# Altium PCB Test.PcbDoc (part 2 of 2)
Units mil, origin at the board's own origin, x right, y up, seen from the top; angles counter-clockwise.
Board outline 6000 x 4000 mil, 2 copper layers (Top Layer, Bottom Layer); 258 components, 193 nets, 731 pads, 0 vias.
Unrouted connection lines stored in the file: 545.
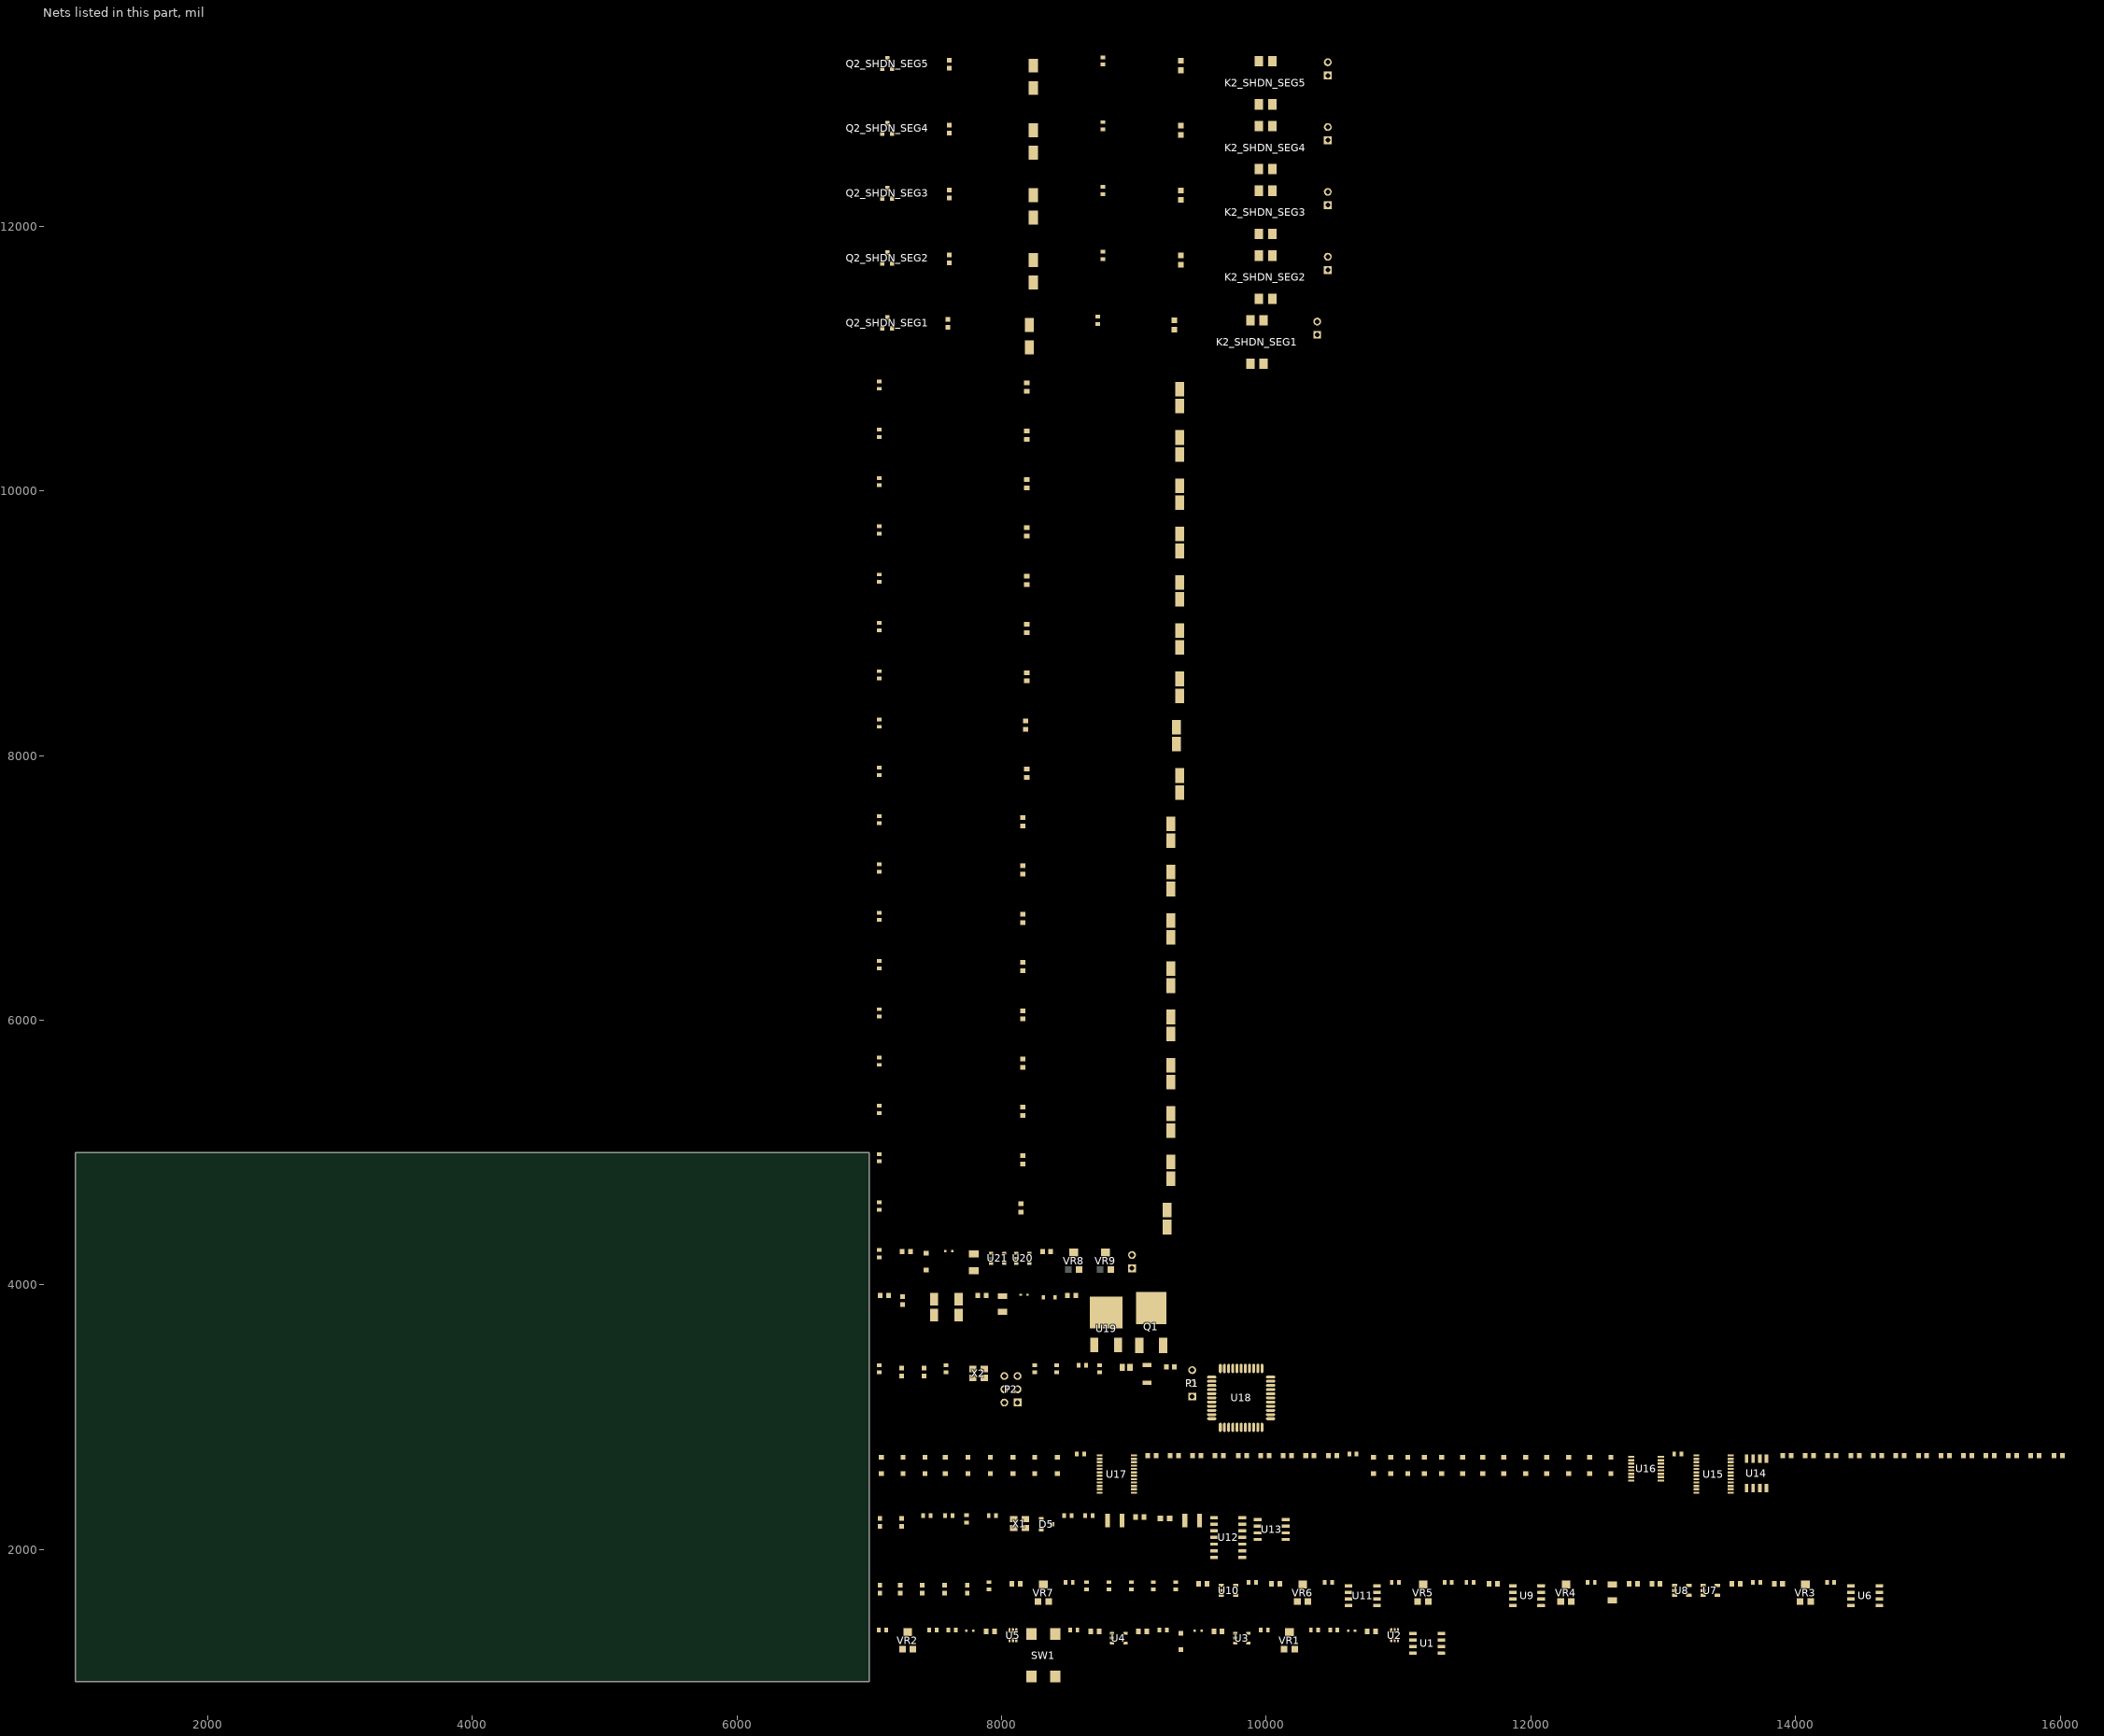
[diagram p2: the nets of this part, all layers, seen from the top]

## Part data
C1 C2 C3 C4 C5 C6 C8 C9 C10 C11 C13 C14 C17 C18 C19 C20 C21 C24 C27 C28_SHDN_INPUT_PROTECTION1 C28_SHDN_INPUT_PROTECTION2 C28_SHDN_INPUT_PROTECTION3 C28_SHDN_INPUT_PROTECTION4 C28_SHDN_INPUT_PROTECTION5 C28_SHDN_INPUT_PROTECTION6 C28_SHDN_INPUT_PROTECTION7 C28_SHDN_INPUT_PROTECTION8 C28_SHDN_INPUT_PROTECTION9 C28_SHDN_INPUT_PROTECTION10 C28_SHDN_INPUT_PROTECTION11 C28_SHDN_INPUT_PROTECTION12 C28_SHDN_INPUT_PROTECTION13 C28_SHDN_INPUT_PROTECTION14 C28_SHDN_INPUT_PROTECTION15 C28_SHDN_INPUT_PROTECTION16 C28_SHDN_INPUT_PROTECTION17 C28_SHDN_INPUT_PROTECTION18: library part CMP-1035-02591-1, "CAP 100nF 50V ±5% 0603 (1608 Metric) Thickness 1mm SMD", Case-EIA=0603, Case-Metric=1608, Rated Voltage="50 V", Tolerance=±5%, Max Thickness="1 mm", Technology=SMT
C7 C25 C26: library part CMP-1037-04982-1, "CAP 10uF 50V ±10% 1206 (3216 Metric) Thickness 1.9mm SMD", Case-EIA=1206, Case-Metric=3216, Rated Voltage="50 V", Tolerance=±10%, Max Thickness="1.9 mm", Technology=SMT
C12: library part CMP-1035-02202-1, "CAP 4.7nF 50V ±5% 0603 (1608 Metric) Thickness 1mm SMD", Case-EIA=0603, Case-Metric=1608, Rated Voltage="50 V", Tolerance=±5%, Max Thickness="1 mm", Technology=SMT
C15 C16 C22 C23: library part CMP-1035-00748-1, "CAP 18pF 50V ±1% 0603 (1608 Metric) Thickness 1mm SMD", Case-EIA=0603, Case-Metric=1608, Rated Voltage="50 V", Tolerance=±1%, Max Thickness="1 mm", Technology=SMT
D1 D3 D4 D33 D37: library part CMP-1063-00102-1, "Transient Voltage Suppressor, Micro-Packaged Diode for ESD Protection, 2-Pin SOD-523, Pb-Free, Tape and Reel", Manufacturer="On Semiconductor", ComponentLink1Description="Manufacturer URL", ComponentLink1URL=http://www.onsemi.com/, ComponentLink2Description=Datasheet, ComponentLink2URL=http://www.onsemi.cn/pub_link/Collateral/ESD5Z2.5T1-D.PDF, ComponentLink3Description="Package Specification", ComponentLink3URL=http://www.onsemi.com/pub_link/Collateral/502-01.PDF, DatasheetVersion="Rev. 10", Direction=Unidirectional, IR Max (uA)=0.05, Mounting Technology="Surface Mount", Number of Lines=1, PackageDescription="2-Pin SOD, Body 1.2 x 0.8 mm", PackageReference=SOD-523-2-502-01, PackageVersion="Rev. E, 09/2010", Packing="Tape and Reel", PartNumber=ESD5Z5.0T1G, PPK Max (W)=174, RoHS=Pb-Free, V(BR) Min (V)=6.2, VRWM Max (V)=5
D2 D6 D7 D8 D9 D10 D11 D12 D13 D14 D15 D16 D17 D18 D19 D20 D21 D22 D23 D24 D25 D26 D27 D36: library part CMP-2000-05976-1, "Surface Mount Zener Diode, 5.1 V, -65 to 150 degC, 2-Pin SMD (SOD-123), RoHS, Tape and Reel", Ir - Reverse Current=2uA, Manufacturer=DiodesIncorporated, Maximum Operating Temperature=+150C, Minimum Operating Temperature=-65C, Package / Case=SOD-123, Package Description="2-Pin Surface Mount Device, Body 2.7 x 1.55 mm", Package Reference=SOD123, Pd - Power Dissipation=500mW, Voltage Temperature Coefficient=-0.75mV/C, Voltage Tolerance=6%, Vz - Zener Voltage=5.1V, Zener Current=5mA, Brand=DiodesIncorporated, Configuration=Single, Datasheet URL=http://www.diodes.com/_files/datasheets/ds18004.pdf, Datasheet Version="Rev. 37-2, 09/2012", Factory Pack Quantity=3000, Height=1.35mm, Length=2.85mm, Manufacturer URL=http://www.diodes.com/, Mounting Style=SMD/SMT, Mounting Technology=SurfaceMount, Packaging=Reel, Product Category=ZenerDiodes, RoHS=True, Series=BZT52C5, Termination Style=SMD/SMT, Unit Weight=0.000353oz, Width=1.7mm, Zz - Zener Impedance=60Ohms
D5: library part CMP-1063-00164-1, "Dual Line CAN Bus Protector, 3-Pin SOT-23, Pb-Free, Tape and Reel", Manufacturer="On Semiconductor", C Max (pF)=30, ComponentLink1Description="Manufacturer URL", ComponentLink1URL=http://www.onsemi.com/, ComponentLink2Description=Datasheet, ComponentLink2URL=http://www.onsemi.cn/pub_link/Collateral/NUP2105L-D.PDF, ComponentLink3Description="Package Specification", ComponentLink3URL=http://www.onsemi.cn/pub_link/Collateral/318-08.PDF, DatasheetVersion="Rev. 5", Direction=Bidirectional, IR Max (uA)=0.1, Mounting Technology="Surface Mount", Number of Lines=2, PackageDescription="3-Pin Small Outline Transistor, Body 2.92 x 1.3 mm, Pitch 0.95 mm", PackageReference=SOT-23-3-318-08, PackageVersion="Rev. AP, 11/2009", Packing="Tape and Reel", PartNumber=NUP2105LT1G, PPK Max (W)=350, RoHS=Pb-Free, V(BR) Min (V)=26.2
D32: library part CMP-1060-00715-1, "Zener Voltage Regulator, 300 mW, 2-Pin SOD-323, Pb-Free, Tape and Reel", Manufacturer="On Semiconductor", ComponentLink1Description="Manufacturer URL", ComponentLink1URL=http://www.onsemi.com/, ComponentLink2Description=Datasheet, ComponentLink2URL=http://www.onsemi.cn/pub_link/Collateral/MM3Z2V4T1-D.PDF, ComponentLink3Description="Package Specification", ComponentLink3URL=http://www.onsemi.com/pub_link/Collateral/477-02.PDF.1, DatasheetVersion="Rev. 9", Mounting Technology="Surface Mount", PackageDescription="2-Pin SOD, Body 1.7 x 1.25 mm", PackageReference=SOD-323-2-477-02, PackageVersion="Rev. H, 03/2007", Packing="Tape and Reel", PartNumber=MM3Z10VT1G, P Max (W)=0.3, RoHS=Pb-Free, VZ Typ (V)=10
D34 D35 D39_SHDN_INPUT_PROTECTION1 D39_SHDN_INPUT_PROTECTION2 D39_SHDN_INPUT_PROTECTION3 D39_SHDN_INPUT_PROTECTION4 D39_SHDN_INPUT_PROTECTION5 D39_SHDN_INPUT_PROTECTION6 D39_SHDN_INPUT_PROTECTION7 D39_SHDN_INPUT_PROTECTION8 D39_SHDN_INPUT_PROTECTION9 D39_SHDN_INPUT_PROTECTION10 D39_SHDN_INPUT_PROTECTION11 D39_SHDN_INPUT_PROTECTION12 D39_SHDN_INPUT_PROTECTION13 D39_SHDN_INPUT_PROTECTION14 D39_SHDN_INPUT_PROTECTION15 D39_SHDN_INPUT_PROTECTION16 D39_SHDN_INPUT_PROTECTION17 D39_SHDN_INPUT_PROTECTION18: library part CMP-0548-00180-2, "Transient Voltage Suppressor, 6.40 to 231 V, 18 V Stand-off Voltage, Bi-Directional, -55 to 155 degC, 2-pin DO-214AC, Pb-Free, Tape and Reel", Manufacturer="Vishay Semiconductor", Operating Junction and Storage Temperature Range="-55 to 150 degC", ComponentLink1Description="Manufacturer URL", ComponentLink1URL=http://www.vishay.com/, ComponentLink2Description=Datasheet, ComponentLink2URL=http://www.vishay.com/docs/88390/smaj50a.pdf, ComponentLink3Description="Package Specification", ComponentLink3URL=http://www.vishay.com/docs/88390/smaj50a.pdf, DatasheetVersion=12/8/2013, ID (uA)=2, IFSM="40 A", Mounting Technology="Surface Mount", PackageDescription="2-Pin DO-214AC (SMA), Body 4.245 x 2.665 mm", PackageReference=DO-214AC-2, Packing="Tape and Reel", PartNumber=SMAJ18CA-E3/61, PPPM (W)="400, 300", RoHS=TRUE, VBR Bi-Directional (V)="6.4 to 231", VWM (V)=18
D38_SHDN_SEG1 D38_SHDN_SEG2 D38_SHDN_SEG3 D38_SHDN_SEG4 D38_SHDN_SEG5: library part CMP-2000-04942-2, "General Purpose Rectifier, 1 A, 1000 V, -55 to 150 degC, 2-Pin DO-214AC, RoHS, Tape and Reel", Alternate Case Style=DO-214AC, Current If @ Vf=1A, Current Ifsm=30A, Forward Voltage=1V, Junction Temperature Tj Max=150degC, Manufacturer=Fairchild, Operating Temperature Min=-55degC, Operating Temperature Range=-55degCto+150degC, Package / Case=SMA, Package Description="2-Pin Surface Mount Device, Body 4.375 x 2.725 mm", Package Reference=DO-214AC-2, Repetitive Reverse Voltage Vrrm Max=1kV, Datasheet URL=https://datasheet.ciiva.com/4452/s1m-191340-4452980.pdf, Datasheet Version="Rev. 1.1.2, 10/2013", Diode Case Style=DO-214AC, Diode Configuration=Single, Diode Polarity=Cathode, Diode Type=StandardRecovery, External Depth=2.79mm, External Length / Height=2.44mm, External Width=5.28mm, Forward Current If(AV)=1A, Forward Surge Current Ifsm Max=30A, Forward Voltage VF Max=1V, Manufacturer URL=https://www.fairchildsemi.com/, No. of Pins=2, Operating Temperature Max=150degC, Package URL=https://www.fairchildsemi.com/package-drawings/DO/DO214AC.pdf, Reel Quantity=7500, Reverse Recovery Time trr Max=1.8µs, Reverse Recovery Time trr Typ=1.8µs, SMD Marking=1M, SVHC=NoSVHC(19-Dec-2012), Tape Width=12mm, Termination Type=SMD
DS1 DS2 DS3 DS4 DS5: library part "LED RED 0603"
DS6 DS7: library part "LED BLUE 0603"
DS8 DS9 DS11_SHDN_SEG1 DS11_SHDN_SEG2 DS11_SHDN_SEG3 DS11_SHDN_SEG4 DS11_SHDN_SEG5: library part "LED ORANGE 0603"
DS10: library part "LED GREEN 0603"
K2_SHDN_SEG1 K2_SHDN_SEG2 K2_SHDN_SEG3 K2_SHDN_SEG4 K2_SHDN_SEG5: library part CMP-1346-00006-1, "PhotoMOS GE 1 Form A, 60 V Load Voltage, 0.55 A Continuous Load Current, -40 to 85 degC, 4-Pin DIP(SMT), Tube, RoHS", Continuous Load Current="0.55 A", Load Voltage="60 V", Manufacturer=Panasonic, On Resistance (Typ)="0.85 Ohm", ComponentLink1Description="Manufacturer URL", ComponentLink1URL=http://www3.panasonic.biz/ac/ae/index.jsp, ComponentLink2Description=Datasheet, ComponentLink2URL=http://www3.panasonic.biz/ac/e_download/control/relay/photomos/catalog/semi_eng_ge1a_aqy21_e.pdf, ComponentLink3Description="Package Specification", ComponentLink3URL=http://www3.panasonic.biz/ac/e_download/control/relay/photomos/catalog/semi_eng_dimensions.pdf?f_cd=401560, DatasheetVersion=201404-T, Mounting Technology="Surface Mount", PackageDescription="4-Pin Surface Mount Terminal Package, Body 4.78 x 6.4 mm, Pitch 2.54mm", PackageReference=DIP4(SMT), PackageVersion="ASCTB67E, 04/2014", Packing=Tube, PartNumber=AQY212EHA, Pb-Free=True, RoHS=True, Series="PhotoMOS GE 1 Form A"
L1: library part CMP-2000-06587-1, "Fixed Inductor, 10 uH, +/-20%, -55 to 125 degC, 2-Pin SMD (0805), RoHS, Tape and Reel", Case Size/Dimension=0805, DC Resistance=0.6, Inductance-Nom=10H, Manufacturer=Murata, Package Description="2-Pin Surface Mount Device, Body 2 x 1.25 mm", Package Reference=IND0805, Rated Current-Max=100mA, Tolerance (%)=20%, Datasheet URL=http://psearch.en.murata.com/inductor/product/LQM21FN100M70%23.pdf, Datasheet Version=05/2016, Manufacturer URL=http://www.murata.com/, Mounting Technology=SurfaceMount
P1: "Header, 3-Pin", LatestRevisionDate=17-Jul-2002, LatestRevisionNote="Re-released for DXP Platform.", Publisher="Altium Limited"
P2: "Header, 3-Pin, Dual row", LatestRevisionDate=17-Jul-2002, LatestRevisionNote="Re-released for DXP Platform.", Publisher="Altium Limited"
P3 P4_SHDN_SEG1 P4_SHDN_SEG2 P4_SHDN_SEG3 P4_SHDN_SEG4 P4_SHDN_SEG5: "Header, 2-Pin", LatestRevisionDate=17-Jul-2002, LatestRevisionNote="Re-released for DXP Platform.", Publisher="Altium Limited"
Q1: library part CMP-1058-00390-1, "Power MOSFET, -60 V, -12 A, P-Channel, 3-Pin DPAK, Pb-Free, Tape and Reel", Manufacturer="On Semiconductor", Package Type="DPAK-3, IPAK-4", PartNumber=NTD2955T4G, Channel Polarity="P Channel", Ciss Typ (pF)=500, ComponentLink1Description="Manufacturer URL", ComponentLink1URL=http://www.onsemi.com/, ComponentLink2Description=Datasheet, ComponentLink2URL=http://www.onsemi.cn/pub_link/Collateral/NTD2955-D.PDF, ComponentLink3Description="Package Specification", ComponentLink3URL=http://www.onsemi.cn/pub_link/Collateral/369C.PDF, Configuration=Single, Coss Typ (pF)=150, Crss Typ (pF)=50, DatasheetVersion="Rev. 13", ID Max (A)=12, Mounting Technology="Surface Mount", PackageDescription="3-Pin Flange Mount, Body 6.54 x 6.095 mm, Pitch 2.29 mm", PackageReference=DPAK-3-369C-01, PackageVersion="Rev. E, 02/2014", Packing="Tape and Reel", PD Max (W)=55, Qrr Typ (nC)=100, RoHS=Pb-Free, V(BR)DSS Min (V)=60, VGS(th) Max (V)=4, VGS Max (V)=20
Q2_SHDN_SEG1 Q2_SHDN_SEG2 Q2_SHDN_SEG3 Q2_SHDN_SEG4 Q2_SHDN_SEG5: library part CMP-1058-00774-1, "Power MOSFET, 60 V, 155 mOhm, Single N-Channel Logic Level, 3-Pin SOT-23, Pb-Free, Tape and Reel", Manufacturer="On Semiconductor", Package Type=SOT-23-3, Channel Polarity="N Channel", Ciss Typ (pF)=182, ComponentLink1Description="Manufacturer URL", ComponentLink1URL=http://www.onsemi.com/, ComponentLink2Description=Datasheet, ComponentLink2URL=http://www.onsemi.com/pub_link/Collateral/NVR5198NL-D.PDF, ComponentLink3Description="Package Specification", ComponentLink3URL=http://www.onsemi.cn/pub_link/Collateral/318-08.PDF, Configuration=Single, Coss Typ (pF)=25, Crss Typ (pF)=16, DatasheetVersion="Rev. 1", ID Max (A)=2.2, Mounting Technology="Surface Mount", PackageDescription="3-Pin Small Outline Transistor, Body 2.92 x 1.3 mm, Pitch 0.95 mm", PackageReference=SOT-23-3-318-08, PackageVersion="Rev. AP, 11/2009", Packing="Tape and Reel", PartNumber=NVR5198NLT1G, Qrr Typ (nC)=6, RoHS=Pb-Free, V(BR)DSS Min (V)=60, VGS(th) Max (V)=2.5, VGS Max (V)=20
R1 R5 R6 R7 R12 R64 R67_SHDN_INPUT_PROTECTION1 R67_SHDN_INPUT_PROTECTION2 R67_SHDN_INPUT_PROTECTION3 R67_SHDN_INPUT_PROTECTION4 R67_SHDN_INPUT_PROTECTION5 R67_SHDN_INPUT_PROTECTION6 R67_SHDN_INPUT_PROTECTION7 R67_SHDN_INPUT_PROTECTION8 R67_SHDN_INPUT_PROTECTION9 R67_SHDN_INPUT_PROTECTION10 R67_SHDN_INPUT_PROTECTION11 R67_SHDN_INPUT_PROTECTION12 R67_SHDN_INPUT_PROTECTION13 R67_SHDN_INPUT_PROTECTION14 R67_SHDN_INPUT_PROTECTION15 R67_SHDN_INPUT_PROTECTION16 R67_SHDN_INPUT_PROTECTION17 R67_SHDN_INPUT_PROTECTION18: library part CMP-1012-00090-1, "4K7 0.1W 5% 0603 (1608 Metric)  SMD", Case-EIA=0603, Case-Metric=1608, Power="0.1 W", Tolerance="5 %", Technology=SMT
R2 R3 R8 R9 R10 R11 R14 R15 R16 R17 R18 R19 R20 R26: library part CMP-1591-00001-1, "0603 (1608 Metric) Chip Resistor", Case-EIA=0603, Case-Metric=1608, PackageReference=RESC0603(1608)
R4 R32 R33 R34 R35 R36 R37 R38 R39 R40 R41 R42 R43 R44 R45 R46 R47 R48 R49 R50 R51 R52 R53 R58 R63: library part CMP-1012-00098-1, "10K 0.1W 5% 0603 (1608 Metric)  SMD", Case-EIA=0603, Case-Metric=1608, Power="0.1 W", Tolerance="5 %", Technology=SMT
R13: library part CMP-1012-00118-1, "68K 0.1W 5% 0603 (1608 Metric)  SMD", Case-EIA=0603, Case-Metric=1608, Power="0.1 W", Tolerance="5 %", Technology=SMT
R21 R22 R23 R24 R25 R30 R31 R59 R60 R61 R66_SHDN_SEG1 R66_SHDN_SEG2 R66_SHDN_SEG3 R66_SHDN_SEG4 R66_SHDN_SEG5: library part CMP-1012-00074-1, "1K 0.1W 5% 0603 (1608 Metric)  SMD", Case-EIA=0603, Case-Metric=1608, Power="0.1 W", Tolerance="5 %", Technology=SMT
R27 R29: library part CMP-1015-00372-1, "60R4 0.5W 1% 1210 (3225 Metric)  SMD", Case-EIA=1210, Case-Metric=3225, Power="0.5 W", Tolerance="1 %", Technology=SMT
R28: library part CMP-1012-00061-1, "300R 0.1W 5% 0603 (1608 Metric)  SMD", Case-EIA=0603, Case-Metric=1608, Power="0.1 W", Tolerance="5 %", Technology=SMT
R62: library part CMP-1012-00122-1, "100K 0.1W 5% 0603 (1608 Metric)  SMD", Case-EIA=0603, Case-Metric=1608, Power="0.1 W", Tolerance="5 %", Technology=SMT
R65_SHDN_SEG1 R65_SHDN_SEG2 R65_SHDN_SEG3 R65_SHDN_SEG4 R65_SHDN_SEG5: library part CMP-1012-00084-1, "2K7 0.1W 5% 0603 (1608 Metric)  SMD", Case-EIA=0603, Case-Metric=1608, Power="0.1 W", Tolerance="5 %", Technology=SMT
SW1: "Cost common SMD button, 4 Lead", ComponentLink1Description=LCSC, ComponentLink1URL=https://lcsc.com/product-detail/Tactile-Switches_BRIGHT-TSA063G50-250_C294565.html
SW2: library part CMP-2100-03586-1, "Ultra-Small Tactile Switch, 0.05 A, 12 V, -25 to 70 degC, 2-Pin SMD, RoHS, Tape and Reel", Case/Package=SMD/SMT, Contact Current Rating=50mA, Insulation Resistance=100MOhm, Manufacturer="Omron Electronic Components", Max Operating Temperature=70degC, Min Operating Temperature=-25degC, Operating Force=1.5N, Package Description="2-Pin Surface Mount Device, Body 3 x 2.5 mm", Package Quantity=1, Package Reference=B3U-1000, Voltage Rating (DC)=12V, Actuator Length=0.4mm, Contact Material=Silver, Current Rating=50mA, Datasheet URL=http://www.omron.com/ecb/products/pdf/en-b3u.pdf, Datasheet Version=42005.0, Depth=2.5mm, Electrical Life=200000Cycles, Height=1.2mm, Illumination Type=Illuminated, Lead Free=LeadFree, Length=4mm, Manufacturer URL=http://www.omron.com/, Max Current Rating=50mA, Mount=SurfaceMount, Orientation=Straight, Packaging=TapeandReel, REACH SVHC=Unknown, RoHSCompliant=true, Switch Travel=0.15mm, Termination=SMD/SMT, Throw Configuration=SPST, Weight=0.022g, Width=3mm
U1 U6 U9 U11 U14: library part CMP-0055-00796-3, "Low Power Dual Operational Amplifier, 8-pin Narrow SOIC", Manufacturer="Texas Instruments", Package Reference=D0008A, PackageTopMarking=NSZXTT*LM*358AM, PowerWise=N, Code_IPC=SOIC127P600-8, Code_JEDEC=MS-012-AA, ComponentLink1Description="Datasheet URL", ComponentLink1URL=http://www.ti.com/general/docs/lit/getliterature.tsp?genericPartNumber=LM358-N&fileType=pdf, CompType=Amplifiers, PackageDescription="SOIC Narrow, 4.9 x 3.9 x 1.45mm, 8 Lead, 1.27mm Pitch", PinCount=8, RoHS=N
U2 U5: library part CMP-2000-06819-1, "Tinylogic(R) UHS 2-Input Non-Inverting Multiplexer, 1.65 to 5.5 V, -40 to 85 degC, 6-Pin SOT23 (SC70), RoHS, Tape and Reel", Manufacturer=FairchildSemiconductor, Maximum High Level Output Current=-32mA, Maximum Low Level Output Current=32mA, Maximum Operating Supply Voltage=5.5V, Minimum Operating Supply Voltage=1.65V, Package=6SC-70, Package Description="6-Pin Small Outline Transistor, Body 2 x 1.25 mm, Pitch 0.65 mm", Package Reference=SC70-6, Tolerant I/Os=5.5InputsV, Category=Multiplexer, Configuration=1x2:1, Datasheet URL=https://www.fairchildsemi.com/datasheets/NC/NC7SZ157.pdf, Datasheet Version=09/2009, Logic Family=TinyLogicUHS, Logic Function=Multiplexer, Manufacturer URL=https://www.fairchildsemi.com/, Maximum Propagation Delay Time @ Maximum CL=4.6@3.3V, Mounting Technology=SurfaceMount, Number of Inputs per Chip=2, Package URL=https://www.fairchildsemi.com/package-drawings/MA/MAA06A.pdf, Packaging=Tape&Reel, Rad Hard=No
U3: library part CMP-0859-00033-4, "Single Schmitt-Trigger Buffer, DBV0005A, LARGE T&R", F @ Nom Voltage(Max)(Mhz)=150, Generic Part Number=SN74LVC1G17, ICC @ Nom Voltage(Max)(mA)=0.01, Manufacturer="Texas Instruments", Operating Temperature Range(C)="-40 to 125,-40 to 85", Rating=Catalog, tpd @ Nom Voltage(Max)(ns)=11,6.5,5.5,5, Voltage(Nom)(V)=1.8,2.5,3.3,5, 3-State Output=No, Bits(#)=1, DatasheetVersion=SCES351V, Input Type=CMOS/TTL, Logic=True, Output Drive (IOL/IOH)(Max)(mA)=32/-32, Output Type=CMOS, PackageReference=DBV0005A, Schmitt Trigger=Yes, Sub-Family="Non-Inverting Buffer/Driver", Technology Family=LVC, VCC(Max)(V)=5.5, VCC(Min)(V)=1.65
U4: library part CMP-2000-07131-1, "Single Schmitt-Trigger Inverter Gate, 10.6 ns max, 2 to 5.5 V, -40 to 125 degC, 5-Pin SOT23 (DBV), Green (RoHS & no Sb/Br), Tape and Reel", Logic Case Style=SOT-23, Manufacturer="Texas Instruments", Operating Temperature Max=85°C, Operating Temperature Min=-40°C, Operating Temperature Range=-40°Cto+85°C, Output Current=8mA, Package Description="5-Pin Small Outline Transistor, Body 2.9 x 1.6 mm, Pitch 0.95 mm", Package Reference=DBV0005A, Supply Voltage=5.5V, Supply Voltage Min=2V, Supply Voltage Range=2Vto5.5V, Base Number=74, Datasheet URL=http://www.ti.com/lit/ds/symlink/sn74ahc1g14.pdf, Datasheet Version="Rev. Q, 09/2015", IC Generic Number=74AHC1G14, Logic Function Number=741G14, Logic IC Base Number=74114, Logic IC Family=AHC, Logic IC Function=SingleInverterwithSchmittTrigger, Logic Type=Inverter, Manufacturer URL=http://www.ti.com/, Mounting Technology=SurfaceMount, No. of Gates=1, No. of Inputs=1, No. of Pins=5, Output Current Max=8mA, Package / Case=SOT-23, Package URL=http://www.ti.com/lit/ml/mpds018l/mpds018l.pdf, Supply Voltage Max=5.5V, SVHC=NoSVHC(19-Dec-2012), Termination Type=SMD
U7 U8 U10: library part CMP-0859-00043-3, "Single 2-Input Positive-AND Gate, DBV0005A, LARGE T&R", F @ Nom Voltage(Max)(Mhz)=75, Generic Part Number=SN74AHC1G08, ICC @ Nom Voltage(Max)(mA)=0.01, Manufacturer="Texas Instruments", Operating Temperature Range(C)="-55 to 125", Rating=Catalog, tpd @ Nom Voltage(Max)(ns)=12.3,7.9, Voltage(Nom)(V)=3.3,5, 3-State Output=No, Bits(#)=1, DatasheetVersion=SCLS314N, Gate Type=AND, Input Type=CMOS, Logic=True, Output Drive (IOL/IOH)(Max)(mA)=50/-50, Output Type=CMOS, PackageReference=DBV0005A, Schmitt Trigger=No, Sub-Family="AND Gate", Technology Family=AHC, VCC(Max)(V)=5.5, VCC(Min)(V)=2
U16: library part CMP-0780-00192-3, "8-Bit Shift Registers With 3-State Output Registers, PW0016A, LARGE T&R", F @ Nom Voltage(Max)(Mhz)=28, Generic Part Number=SN74HC595, ICC @ Nom Voltage(Max)(mA)=0.08, Manufacturer="Texas Instruments", Operating Temperature Range(C)="-40 to 85", Rating=Military, tpd @ Nom Voltage(Max)(ns)=34, Voltage(Nom)(V)=6, 3-State Output=Yes, Bits=8, Code_JEDEC=MO-153, DatasheetVersion=SCLS041H, Input Type=CMOS, Output Drive (IOL/IOH)(Max)(mA)=7.8/-7.8, Output Type=CMOS, PackageReference=PW0016A, PackageVersion=http://www.ti.com/lit/ml/mpds361/mpds361.pdf, Technology Family=HC, VCC(Max)(V)=6, VCC(Min)(V)=2
U18: library part CMP-0095-00577-1, "8-bit AVR Microcontroller, 128KB Flash, 4KB EEPROM, 16KB SRAM, 44-pin TQFP, Industrial Grade (-40°C to 85°C)", Code_JEDEC=MS-026-ACB, ComponentLink1Description="Manufacturer URL", ComponentLink1URL=http://www.atmel.com/, ComponentLink2Description="ATmega164A/164PA/324A/324PA/644A/644PA/1284/1284P Datasheet", ComponentLink2URL=http://www.atmel.com/dyn/resources/prod_documents/doc8272.pdf, ComponentLink3Description="ATmega164A/164PA/324A/324PA/644A/644PA/1284/1284P Summary", ComponentLink3URL=http://www.atmel.com/dyn/resources/prod_documents/8272S.pdf, DatasheetVersion="revC, Jun-2011", PackageDescription="44-Pin Plastic Thin Profile Quad Flat Pack, 10 x 10 x 1.0 mm Body, 0.8 mm Pitch (TQFP)", PackageReference=44A, PackageVersion="revC, Oct-2010"
U19: library part CMP-2000-06530-1, "Precision Regulator, 0.5 A, 5 V Output, 0 to 150 degC, 3-Pin DPAK (TO252), RoHS, Tube", Input Voltage Max=35V, Input Voltage Min=10V, Linear Regulator Case Style=TO-252, Manufacturer=STMicroelectronics, Operating Temperature Max=150°C, Operating Temperature Min=0°C, Output Current=500mA, Output Voltage Nom.=5V, Package Description="3-Pin Transistor Outline, Body 6.5 x 6.1 mm, Pitch 2.28 mm", Package Reference=TO252, Datasheet URL=http://www.st.com/content/ccc/resource/technical/document/datasheet/d7/5f/dc/5c/d5/b6/48/7c/CD00000447.pdf/files/CD00000447.pdf/jcr:content/translations/en.CD00000447.pdf, Datasheet Version="Rev. 20, 06/2014", Manufacturer URL=http://www.st.com/, Mounting Technology=SurfaceMount, No. of Pins=3Pins, Packaging=Each, SVHC=NoSVHC(17-Dec-2015)
U20 U21: library part CMP-0859-00024-3, "Single 2-Input Positive-NOR Gate, DBV0005A, LARGE T&R", F @ Nom Voltage(Max)(Mhz)=75, Generic Part Number=SN74AHC1G02, ICC @ Nom Voltage(Max)(mA)=0.01, Manufacturer="Texas Instruments", Operating Temperature Range(C)="-40 to 125,-40 to 85", Rating=Catalog, tpd @ Nom Voltage(Max)(ns)=11.4,7.5, Voltage(Nom)(V)=3.3,5, 3-State Output=No, Bits(#)=1, DatasheetVersion=SCLS342M, Gate Type=NOR, Input Type=CMOS, Logic=True, Output Drive (IOL/IOH)(Max)(mA)=50/-50, Output Type=CMOS, PackageReference=DBV0005A, Schmitt Trigger=No, Sub-Family="NAND Gate", Technology Family=AHC, VCC(Max)(V)=5.5, VCC(Min)(V)=2
VR1 VR2 VR3 VR4 VR5 VR6 VR7 VR9: "4k7 ±25% ±250 ppm/°C SMD Variable Resistors RoHS", ComponentLink1Description=LCSC, ComponentLink1URL=https://lcsc.com/product-detail/Variable-Resistors_HDK-Hokuriku-Elec-Industry-VG039NCHXTB472_C128555.html
VR8: "500K ±25% ±250 ppm/°C SMD Variable Resistors RoHS", ComponentLink1Description=LCSC, ComponentLink1URL=https://lcsc.com/product-detail/Variable-Resistors_HDK-Hokuriku-Elec-Industry-VG039NCHXTB504_C128558.html
X1: ComponentLink1Description=LCSC, ComponentLink1URL=https://lcsc.com/product-detail/SMD-Crystal-Resonators_Yangxing-Tech-X322520MSB4SI_C9004.html
X2: ComponentLink1Description=LCSC, ComponentLink1URL=https://lcsc.com/product-detail/SMD-Crystal-Resonators_Yangxing-Tech-X322516MOB4SI_C12668.html

## Nets (pads, with @x,y where several pads share a name; then routed paths per layer and width w, separated by ;. In a path a pad name is that pad's centre, name@x,y a point inside that pad or via, vN(x,y) a via of type N, cw(c..) or ccw(c..) an arc to the next point about the centre after c; other vN are vias at no path point)
+5: C13.2 C14.2 C17.1 C18.2 C19.1 C25.2 D33.1 L1.2 P2.2 P3.1 R2.2 R5.2 R8.2 R10.2 R12.2 R14.2 R16.2 R18.2 R20.2 R21.2 R22.2 R23.2 R24.2 R30.2 R31.2 R58.2 R61.2 R64.2 R65_SHDN_SEG1.1 R65_SHDN_SEG2.1 R65_SHDN_SEG3.1 R65_SHDN_SEG4.1 R65_SHDN_SEG5.1 U1.8 U2.5 U3.5 U4.5 U5.5 U6.8 U7.5 U8.5 U9.8 U10.5 U11.8 U12.14 U13.3 U14.8 U15.24 U16.16 U17.24 U18.5 U18.17 U18.38 U19.3 U20.1 U20.5 U21.5 VR1.1 VR2.1 VR3.1 VR4.1 VR5.1 VR6.1 VR7.1 VR8.1
+12: C24.2 D32.1 D35.2 Q1.3 U19.1
BKR_PRS_ADJ_HIGH: C5.1 R10.1 R11.2 U6.3 VR3.2
BKR_PRS_ADJ_LOW: C8.1 R14.1 R15.2 U9.2 VR4.2
BPSD_DELAY: C7.2 R13.2 U6.5
BPSD_DELAY_RESISTOR: R13.1 R25.2 U8.4
BPSD_DELAY_RESISTOR_INDICATOR: DS5.1 R25.1
BPSD_OP_UNUSED: U9.6 U9.7
BPSD_VREF: R16.1 R17.2 U6.6 VR5.2
BRK_PRS_IN: C6.1 R42.1 U2.4 U6.2 U9.3
BRK_PRS_IN_BUFFERED: U1.1 U1.2 U2.3
BRK_PRS_IN_RAW: C1.1 D1.1 R1.2 U1.3
BRK_PRS_OP: U7.4 U8.1
BRK_PRS_OP_HIGH: DS1.2 U6.1 U7.1
BRK_PRS_OP_HIGH_INDICATOR: DS1.1 R21.1
BRK_PRS_OP_LOW: DS2.2 U7.2 U9.1
BRK_PRS_OP_LOW_INDICATOR: DS2.1 R22.1
BRK_PRS_SIM: R2.1 R3.2 U2.1 VR1.2
CAN_CS: U12.13 U18.43
CAN_CTRL_CLKO: U12.3
CAN_INT: U12.4 U18.40
CAN_INT0: U12.9 U18.42
CAN_INT1: U12.8 U18.41
CAN_N: D5.1 R29.1 U13.6
CAN_P: D5.2 R27.2 U13.7
CAN_RX: DS7.2 U12.2 U13.4
CAN_RX_LED: DS7.1 R31.1
CAN_SPLIT: C12.2 R27.1 R28.2 R29.2
CAN_SPLIT_R: R28.1 U13.5
CAN_TX: DS6.2 U12.1 U13.1
CAN_TX_LED: DS6.1 R30.1
CAN_X1_20MHz: C15.2 U12.6 X1.1
CAN_X2_20MHz: C16.2 U12.5 X1.3
GND: C1.2 C2.2 C3.2 C4.2 C5.2 C6.2 C7.1 C8.2 C9.2 C10.2 C11.2 C12.1 C13.1 C14.1 C15.1 C16.1 C17.2 C18.1 C19.2 C20.2 C21.2 C22.1 C23.1 C24.1 C25.1 C27.2 C28_SHDN_INPUT_PROTECTION1.2 C28_SHDN_INPUT_PROTECTION2.2 C28_SHDN_INPUT_PROTECTION3.2 C28_SHDN_INPUT_PROTECTION4.2 C28_SHDN_INPUT_PROTECTION5.2 C28_SHDN_INPUT_PROTECTION6.2 C28_SHDN_INPUT_PROTECTION7.2 C28_SHDN_INPUT_PROTECTION8.2 C28_SHDN_INPUT_PROTECTION9.2 C28_SHDN_INPUT_PROTECTION10.2 C28_SHDN_INPUT_PROTECTION11.2 C28_SHDN_INPUT_PROTECTION12.2 C28_SHDN_INPUT_PROTECTION13.2 C28_SHDN_INPUT_PROTECTION14.2 C28_SHDN_INPUT_PROTECTION15.2 C28_SHDN_INPUT_PROTECTION16.2 C28_SHDN_INPUT_PROTECTION17.2 C28_SHDN_INPUT_PROTECTION18.2 D1.2 D2.1 D3.2 D4.2 D5.3 D6.1 D7.1 D8.1 D9.1 D10.1 D11.1 D12.1 D13.1 D14.1 D15.1 D16.1 D17.1 D18.1 D19.1 D20.1 D21.1 D22.1 D23.1 D24.1 D25.1 D26.1 D27.1 D33.2 D34.1 D35.1 D36.1 D37.2 D38_SHDN_SEG1.1 D38_SHDN_SEG2.1 D38_SHDN_SEG3.1 D38_SHDN_SEG4.1 D38_SHDN_SEG5.1 D39_SHDN_INPUT_PROTECTION1.1 D39_SHDN_INPUT_PROTECTION2.1 D39_SHDN_INPUT_PROTECTION3.1 D39_SHDN_INPUT_PROTECTION4.1 D39_SHDN_INPUT_PROTECTION5.1 D39_SHDN_INPUT_PROTECTION6.1 D39_SHDN_INPUT_PROTECTION7.1 D39_SHDN_INPUT_PROTECTION8.1 D39_SHDN_INPUT_PROTECTION9.1 D39_SHDN_INPUT_PROTECTION10.1 D39_SHDN_INPUT_PROTECTION11.1 D39_SHDN_INPUT_PROTECTION12.1 D39_SHDN_INPUT_PROTECTION13.1 D39_SHDN_INPUT_PROTECTION14.1 D39_SHDN_INPUT_PROTECTION15.1 D39_SHDN_INPUT_PROTECTION16.1 D39_SHDN_INPUT_PROTECTION17.1 D39_SHDN_INPUT_PROTECTION18.1 DS5.2 DS8.2 DS9.2 DS10.2 DS11_SHDN_SEG1.2 DS11_SHDN_SEG2.2 DS11_SHDN_SEG3.2 DS11_SHDN_SEG4.2 DS11_SHDN_SEG5.2 P1.1 P2.6 Q2_SHDN_SEG1.2 Q2_SHDN_SEG2.2 Q2_SHDN_SEG3.2 Q2_SHDN_SEG4.2 Q2_SHDN_SEG5.2 R1.1 R3.1 R7.1 R9.1 R11.1 R15.1 R17.1 R19.1 R26.1 R62.1 R64.1 R67_SHDN_INPUT_PROTECTION1.1 R67_SHDN_INPUT_PROTECTION2.1 R67_SHDN_INPUT_PROTECTION3.1 R67_SHDN_INPUT_PROTECTION4.1 R67_SHDN_INPUT_PROTECTION5.1 R67_SHDN_INPUT_PROTECTION6.1 R67_SHDN_INPUT_PROTECTION7.1 R67_SHDN_INPUT_PROTECTION8.1 R67_SHDN_INPUT_PROTECTION9.1 R67_SHDN_INPUT_PROTECTION10.1 R67_SHDN_INPUT_PROTECTION11.1 R67_SHDN_INPUT_PROTECTION12.1 R67_SHDN_INPUT_PROTECTION13.1 R67_SHDN_INPUT_PROTECTION14.1 R67_SHDN_INPUT_PROTECTION15.1 R67_SHDN_INPUT_PROTECTION16.1 R67_SHDN_INPUT_PROTECTION17.1 R67_SHDN_INPUT_PROTECTION18.1 SW1.3 SW1.4 SW2.1 U1.4 U2.2 U3.3 U4.3 U5.2 U6.4 U7.3 U8.3 U9.4 U9.5 U10.3 U11.4 U12.7 U13.2 U13.8 U14.4 U15.12 U15.15 U16.8 U16.13 U17.12 U17.15 U18.6 U18.18 U18.28 U18.39 U19.4 U20.3 U21.3 VR1.3 VR2.3 VR3.3 VR4.3 VR5.3 VR6.3 VR7.3 X1.2 X1.4 X2.2 X2.4
LED_SHDN_SEG1: DS11_SHDN_SEG1.1 R66_SHDN_SEG1.1
LED_SHDN_SEG2: DS11_SHDN_SEG2.1 R66_SHDN_SEG2.1
LED_SHDN_SEG3: DS11_SHDN_SEG3.1 R66_SHDN_SEG3.1
LED_SHDN_SEG4: DS11_SHDN_SEG4.1 R66_SHDN_SEG4.1
LED_SHDN_SEG5: DS11_SHDN_SEG5.1 R66_SHDN_SEG5.1
LEM_ADJ_HIGH: C9.1 R18.1 R19.2 U11.3 VR6.2
LEM_ADJ_LOW: C11.1 R20.1 R26.2 U11.6 VR7.2
LEM_IN: C10.1 R43.1 U5.4 U11.2 U11.5
LEM_IN_BUFFERED: U1.6 U1.7 U5.3
LEM_IN_RAW: C4.1 D4.1 R7.2 U1.5
LEM_OP: U8.2 U10.4
LEM_OP_HIGH: DS3.2 U10.1 U11.1
LEM_OP_HIGH_INDICATOR: DS3.1 R23.1
LEM_OP_LOW: DS4.2 U10.2 U11.7
LEM_OP_LOW_INDICATOR: DS4.1 R24.1
LEM_SIM: R8.1 R9.2 U5.1 VR2.2
MCU_AREF: U18.29
MCU_AVCC: C21.1 L1.1 U18.27
MCU_CLK: P2.3 U12.10 U18.3
MCU_LED_A: R59.2 U18.15
MCU_LED_A_LED: DS8.1 R59.1
MCU_LED_B: R60.2 U18.16
MCU_LED_B_LED: DS9.1 R60.1
MCU_MISO: P2.1 U12.12 U18.2
MCU_MOSI: P2.4 U12.11 U18.1
MCU_PA2: U18.35
MCU_PA3: U18.34
MCU_PA4: U18.33
MCU_PA5: U18.32
MCU_PA6: U18.31
MCU_PA7: U18.30
MCU_PB4: U18.44
MCU_PC0: U18.19
MCU_PC1: U18.20
MCU_PC2: U18.21
MCU_PC3: U18.22
MCU_PD2: U18.11
MCU_PD3: U18.12
MCU_PD4: U18.13
MCU_PD5: U18.14
MCU_RESET: C20.1 P2.5 R58.1 SW2.2 U18.4
MCU_UART_RX: P1.3 U18.9
MCU_UART_TX: P1.2 U18.10
MCU_XTAL_1: C22.2 U18.8 X2.1
MCU_XTAL_2: C23.2 U18.7 X2.3
MUX_A_0: U15.10 U16.15
MUX_A_1: U15.11 U16.1
MUX_A_2: U15.14 U16.2
MUX_A_3: U15.13 U16.3
MUX_A_SENSE: U14.3 U15.1
MUX_A_UNUSED1: U15.18
MUX_A_UNUSED2: U15.17
MUX_A_UNUSED3: U15.16
MUX_B_0: U16.4 U17.10
MUX_B_1: U16.5 U17.11
MUX_B_2: U16.6 U17.14
MUX_B_3: U16.7 U17.13
MUX_B_SENSE: U14.5 U17.1
MUX_B_UNUSED1: U17.22
MUX_B_UNUSED2: U17.21
MUX_B_UNUSED3: U17.20
MUX_B_UNUSED4: U17.19
MUX_B_UNUSED5: U17.18
MUX_B_UNUSED6: U17.17
MUX_B_UNUSED7: U17.16
MUX_BRAKE_OVERTRAVEL: D27.2 R53.2 U17.23
MUX_BRK_PRS_IN: D16.2 R42.2 U15.21
MUX_BSPD_TEST: D18.2 R44.2 U15.19
MUX_DASH_INERTIA: D26.2 R52.2 U17.2
MUX_ESTOP_DASH: D25.2 R51.2 U17.3
MUX_ESTOP_LEFT: D23.2 R49.2 U17.5
MUX_ESTOP_RIGHT: D24.2 R50.2 U17.4
MUX_INPUT_BMS: D8.2 R34.2 U15.7
MUX_INPUT_BSPD: D10.2 R36.2 U15.5
MUX_INPUT_HVD: D6.2 R32.2 U15.9
MUX_INPUT_IMD: D7.2 R33.2 U15.8
MUX_INPUT_PDOC: D9.2 R35.2 U15.6
MUX_LEM_IN: D17.2 R43.2 U15.20
MUX_SENSE_BMS: D13.2 R39.2 U15.2
MUX_SENSE_BSPD: D15.2 R41.2 U15.22
MUX_SENSE_HVD: D11.2 R37.2 U15.4
MUX_SENSE_IMD: D12.2 R38.2 U15.3
MUX_SENSE_PDOC: D14.2 R40.2 U15.23
MUX_SHIFT_CLK: U16.11 U18.26
MUX_SHIFT_DATA: U16.14 U18.24
MUX_SHIFT_LATCH: U16.12 U18.25
MUX_SHIFT_OUT: U16.9
MUX_SHIFT_RESET: U16.10 U18.23
MUX_UPRIGHT_BL: D19.2 R45.2 U17.9
MUX_UPRIGHT_BR: D20.2 R46.2 U17.8
MUX_UPRIGHT_FL: D21.2 R47.2 U17.7
MUX_UPRIGHT_FR: D22.2 R48.2 U17.6
NetC26_1: C26.1 U21.1 VR9.2
NetC26_2: C26.2 U20.4
NetP3_2: P3.2 VR8.2 VR9.1
PWR_ONLED: DS10.1 R61.1
PWR_PLRTY: D32.2 Q1.1 R62.2
SHDN_BPSD_TEST: R4.2
SHDN_BSPD_TEST_COMMAND: R44.1 U2.6 U3.4 U4.4 U5.6
SHDN_BSPD_TEST_PROTECTED: C2.1 D2.2 D3.1 R4.1 U3.2
SHDN_BSPD_TEST_SCHMITT_UNUSED: U3.1
SHDN_IN1: P4_SHDN_SEG1.1
SHDN_IN2: P4_SHDN_SEG1.2 P4_SHDN_SEG2.1
SHDN_IN3: P4_SHDN_SEG2.2 P4_SHDN_SEG3.1
SHDN_IN4: P4_SHDN_SEG3.2 P4_SHDN_SEG4.1
SHDN_IN5: P4_SHDN_SEG4.2 P4_SHDN_SEG5.1
SHDN_LINE_SHDN_SEG1: 
SHDN_LINE_SHDN_SEG2: 
SHDN_LINE_SHDN_SEG3: 
SHDN_LINE_SHDN_SEG4: 
SHDN_LINE_SHDN_SEG5: 
SHDN_OUT5: P4_SHDN_SEG5.2
SHDN_SEG_LATCH: C27.1 D36.2 D37.1 Q2_SHDN_SEG1.1 Q2_SHDN_SEG2.1 Q2_SHDN_SEG3.1 Q2_SHDN_SEG4.1 Q2_SHDN_SEG5.1 R63.2 U20.2 U21.4
SHDN_SENSE_A: U14.1 U14.2 U18.37
SHDN_SENSE_B: U14.6 U14.7 U18.36
SHDN_STATE_SHDN_SEG1: 
SHDN_STATE_SHDN_SEG2: 
SHDN_STATE_SHDN_SEG3: 
SHDN_STATE_SHDN_SEG4: 
SHDN_STATE_SHDN_SEG5: 
SHDN_TEST_BSPD_BTN: R5.1 R6.2 SW1.1 SW1.2
SHDN_TEST_BSPD_BUFFER_UNUSED: U4.1
SHDN_TEST_BSPD_SWITCH: C3.1 R6.1 U4.2
SIGNAL_IN1: C28_SHDN_INPUT_PROTECTION1.1 D39_SHDN_INPUT_PROTECTION1.2 R63.1 R67_SHDN_INPUT_PROTECTION1.2
SIGNAL_IN2: C28_SHDN_INPUT_PROTECTION2.1 D39_SHDN_INPUT_PROTECTION2.2 R32.1 R67_SHDN_INPUT_PROTECTION2.2
SIGNAL_IN3: C28_SHDN_INPUT_PROTECTION3.1 D39_SHDN_INPUT_PROTECTION3.2 R33.1 R67_SHDN_INPUT_PROTECTION3.2
SIGNAL_IN4: C28_SHDN_INPUT_PROTECTION4.1 D39_SHDN_INPUT_PROTECTION4.2 R34.1 R67_SHDN_INPUT_PROTECTION4.2
SIGNAL_IN5: C28_SHDN_INPUT_PROTECTION5.1 D39_SHDN_INPUT_PROTECTION5.2 R35.1 R67_SHDN_INPUT_PROTECTION5.2
SIGNAL_IN6: C28_SHDN_INPUT_PROTECTION6.1 D39_SHDN_INPUT_PROTECTION6.2 R53.1 R67_SHDN_INPUT_PROTECTION6.2
SIGNAL_IN7: C28_SHDN_INPUT_PROTECTION7.1 D39_SHDN_INPUT_PROTECTION7.2 R52.1 R67_SHDN_INPUT_PROTECTION7.2
SIGNAL_IN8: C28_SHDN_INPUT_PROTECTION8.1 D39_SHDN_INPUT_PROTECTION8.2 R51.1 R67_SHDN_INPUT_PROTECTION8.2
SIGNAL_IN9: C28_SHDN_INPUT_PROTECTION9.1 D39_SHDN_INPUT_PROTECTION9.2 R50.1 R67_SHDN_INPUT_PROTECTION9.2
SIGNAL_IN10: C28_SHDN_INPUT_PROTECTION10.1 D39_SHDN_INPUT_PROTECTION10.2 R49.1 R67_SHDN_INPUT_PROTECTION10.2
SIGNAL_IN11: C28_SHDN_INPUT_PROTECTION11.1 D39_SHDN_INPUT_PROTECTION11.2 R46.1 R67_SHDN_INPUT_PROTECTION11.2
SIGNAL_IN12: C28_SHDN_INPUT_PROTECTION12.1 D39_SHDN_INPUT_PROTECTION12.2 R45.1 R67_SHDN_INPUT_PROTECTION12.2
SIGNAL_IN13: C28_SHDN_INPUT_PROTECTION13.1 D39_SHDN_INPUT_PROTECTION13.2 R48.1 R67_SHDN_INPUT_PROTECTION13.2
SIGNAL_IN14: C28_SHDN_INPUT_PROTECTION14.1 D39_SHDN_INPUT_PROTECTION14.2 R47.1 R67_SHDN_INPUT_PROTECTION14.2
SIGNAL_IN15: C28_SHDN_INPUT_PROTECTION15.1 D39_SHDN_INPUT_PROTECTION15.2 R67_SHDN_INPUT_PROTECTION15.2
SIGNAL_IN16: C28_SHDN_INPUT_PROTECTION16.1 D39_SHDN_INPUT_PROTECTION16.2 R67_SHDN_INPUT_PROTECTION16.2
SIGNAL_IN17: C28_SHDN_INPUT_PROTECTION17.1 D39_SHDN_INPUT_PROTECTION17.2 R67_SHDN_INPUT_PROTECTION17.2
SIGNAL_IN18: C28_SHDN_INPUT_PROTECTION18.1 D39_SHDN_INPUT_PROTECTION18.2 R67_SHDN_INPUT_PROTECTION18.2
SSR_GND_SHDN_SEG1: K2_SHDN_SEG1.2 Q2_SHDN_SEG1.3
SSR_GND_SHDN_SEG2: K2_SHDN_SEG2.2 Q2_SHDN_SEG2.3
SSR_GND_SHDN_SEG3: K2_SHDN_SEG3.2 Q2_SHDN_SEG3.3
SSR_GND_SHDN_SEG4: K2_SHDN_SEG4.2 Q2_SHDN_SEG4.3
SSR_GND_SHDN_SEG5: K2_SHDN_SEG5.2 Q2_SHDN_SEG5.3
SSR_PWR_SHDN_SEG1: K2_SHDN_SEG1.1 R65_SHDN_SEG1.2
SSR_PWR_SHDN_SEG2: K2_SHDN_SEG2.1 R65_SHDN_SEG2.2
SSR_PWR_SHDN_SEG3: K2_SHDN_SEG3.1 R65_SHDN_SEG3.2
SSR_PWR_SHDN_SEG4: K2_SHDN_SEG4.1 R65_SHDN_SEG4.2
SSR_PWR_SHDN_SEG5: K2_SHDN_SEG5.1 R65_SHDN_SEG5.2
STATE_SENSE1: D38_SHDN_SEG1.2 K2_SHDN_SEG1.3 R37.1 R66_SHDN_SEG1.2
STATE_SENSE2: D38_SHDN_SEG2.2 K2_SHDN_SEG2.3 R38.1 R66_SHDN_SEG2.2
STATE_SENSE3: D38_SHDN_SEG3.2 K2_SHDN_SEG3.3 R39.1 R66_SHDN_SEG3.2
STATE_SENSE4: D38_SHDN_SEG4.2 K2_SHDN_SEG4.3 R40.1 R66_SHDN_SEG4.2
STATE_SENSE5: D38_SHDN_SEG5.2 K2_SHDN_SEG5.3 R41.1 R66_SHDN_SEG5.2
STATE_TRIGGER: K2_SHDN_SEG1.4 K2_SHDN_SEG2.4 K2_SHDN_SEG3.4 K2_SHDN_SEG4.4 K2_SHDN_SEG5.4
STATE_TRIGGER5: R12.1 R36.1 U6.7
VCC: D34.2 Q1.4
pads on no net: U21.2 VR8.3 VR9.3

## Text inside footprints (layer, text, board x,y; h text height)
P2: Top Overlay "6" at 8040,3370 h50 r90; Top Overlay "5" at 8140,3370 h50 r90; Top Overlay "2" at 8040,3010 h50 r90; Top Overlay "1" at 8140,3030 h50 r90